# Altium PCB Copy of djb_v2_jig_a.PcbDoc
Units mm, origin at the board's own origin, x right, y up, seen from the top; angles counter-clockwise.
Board outline 59 x 33.99 mm, 2 copper layers (Top Layer, Bottom Layer), stack 1.569 mm thick; 19 components, 9 nets, 35 pads, 0 vias.
Unrouted connection lines stored in the file: 12.
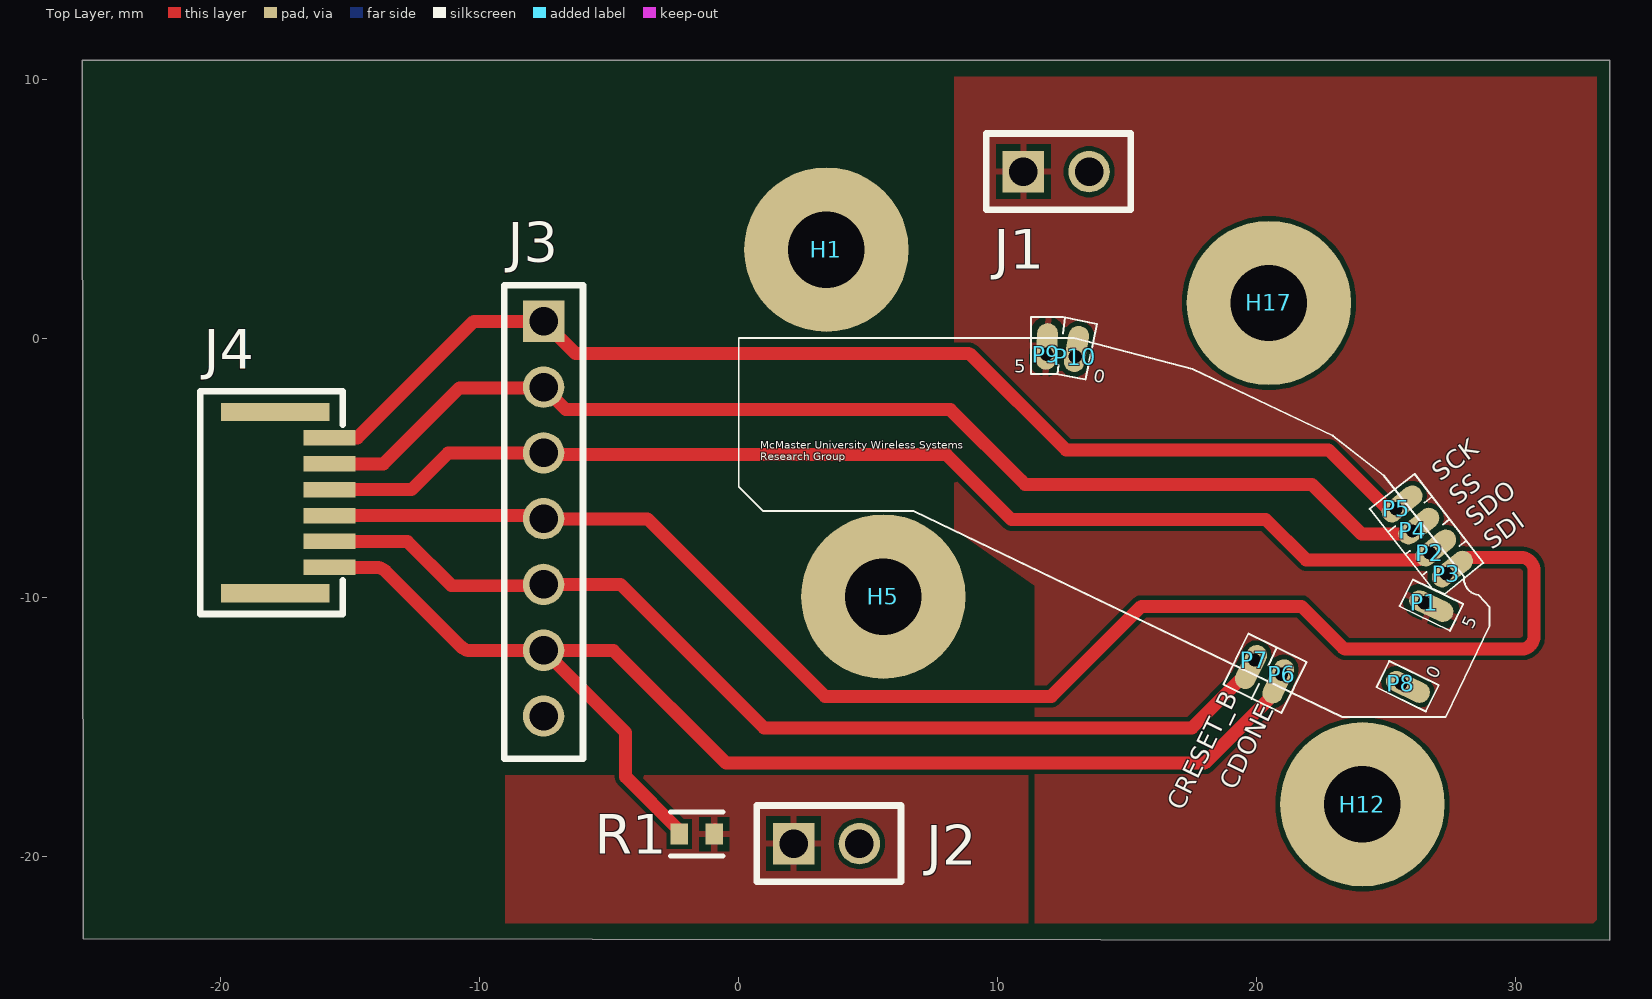
[diagram p0: Top Layer view]
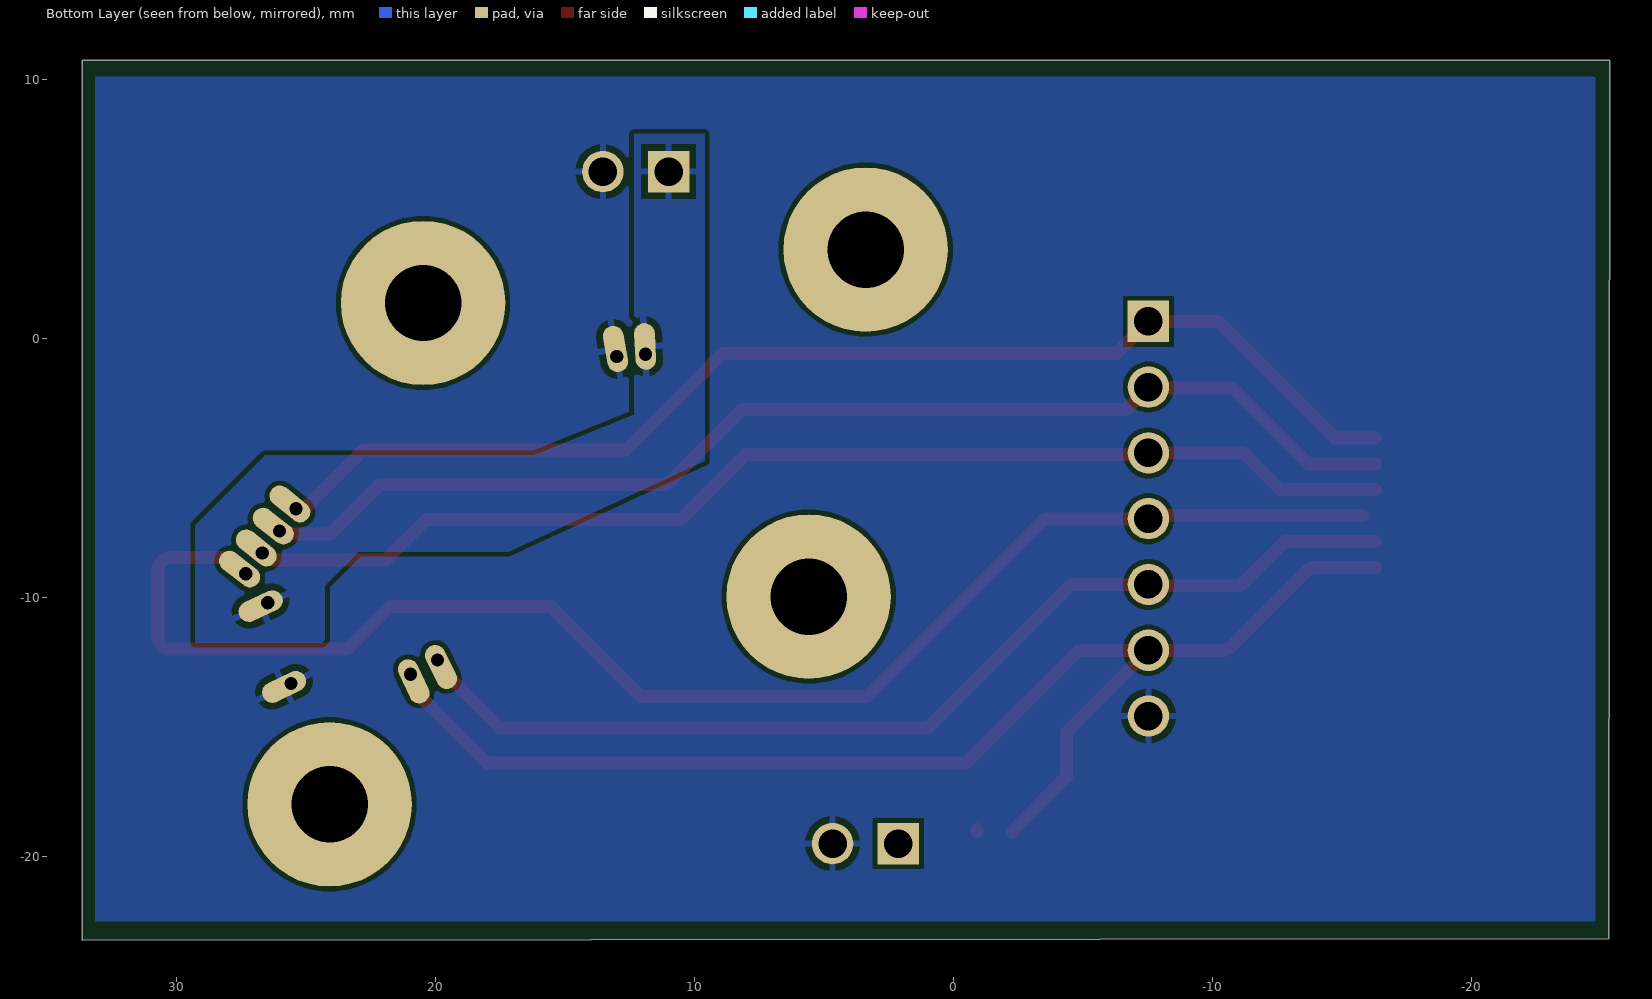
[diagram p1: Bottom Layer view, seen from below]

## Layer stack, top to bottom
Top Solder: solder mask 0.0254, SM-001, Dk 4
Top Layer: signal copper 0.035
Dielectric 1: core 1.4986, Core-043, Dk 4.3
Bottom Layer: signal copper 0.035
Bottom Solder: solder mask 0.0254, SM-001, Dk 4

## Board outline
-25.31,-23.19 -25.36,10.75 33.64,10.75 33.64,-23.24

## Design rules (kind name [scope] priority, off if disabled: settings)
Clearance [All] p1: gap=0.178 ignorepadtopadclearanceinfootprint=FALSE
ComponentClearance [All] p1: gap=0.025 collisioncheckmode=3 verticalgap=0.025 showdistances=TRUE
HoleSize [All] p1: absolutevalues=TRUE maxlimit=5.08 minlimit=0.254 maxpercent=80.000 minpercent=20.000
MinimumSolderMaskSliver [All] p1: minsoldermaskwidth=0.127
PolygonConnect [All] p1: connectstyle=Relief reliefconductorwidth=0.254 reliefentries=4 polygonreliefangle="90 Angle" airgapwidth=0.254
RoutingVias [All] p1: holewidth=0.51 width=0.8 viastyle="Through Hole" minholewidth=0.51 minwidth=0.8 maxholewidth=0.51 maxwidth=0.8
SilkToSilkClearance [All] p1: silktosilkclearance=0
SilkToSolderMaskClearance [IsPad] p1: minsilkscreentomaskgap=0 clearancetoexposedcopper=TRUE
SolderMaskExpansion [All] p1: expansion=0.102 istentingtop=FALSE
Width [All] p1: maxlimit=0.5 minlimit=0.127 preferedwidth=0.254
25 further rules are at their usual default settings.

## Components (designator, comment, footprint, x,y, rotation, side; value= is the part's Value field where it differs from the comment)
H1 "SCREW_4-40_1/4-SPACER" SCREW_4-40_1/4-SPACER 3.38,3.43 r0 top
H5 "SCREW_4-40_1/4-SPACER" SCREW_4-40_1/4-SPACER 5.58,-9.97 r0 top
H12 "SCREW_4-40_1/4-SPACER" SCREW_4-40_1/4-SPACER 24.08,-17.99 r0 top
H17 "SCREW_4-40_1/4-SPACER" SCREW_4-40_1/4-SPACER 20.47,1.37 r0 top
J1 "HDR_2" 2-POS_HEADER 12.26,6.44 r0 top
J2 "HDR_2" 2-POS_HEADER 3.39,-19.51 r0 top
J3 "prog_connect" 7-POS_HEADER -7.54,0.66 r270 top
J4 "FFC" AMPHENOL_HFW6R-1STE1LF -16.85,-6.34 r180 top
P1 "SMITHS_S-00-U-1.3-G_TH" SMITHS_S-00-U-1.3-G_TH 26.47,-10.21 r129 top
P2 "SMITHS_S-00-U-1.3-G_TH" SMITHS_S-00-U-1.3-G_TH 26.68,-8.28 r193 top
P3 "SMITHS_S-00-U-1.3-G_TH" SMITHS_S-00-U-1.3-G_TH 27.32,-9.09 r192 top
P4 "SMITHS_S-00-U-1.3-G_TH" SMITHS_S-00-U-1.3-G_TH 26.02,-7.43 r192 top
P5 "SMITHS_S-00-U-1.3-G_TH" SMITHS_S-00-U-1.3-G_TH 25.38,-6.58 r193 top
P6 "SMITHS_S-00-U-1.3-G_TH" SMITHS_S-00-U-1.3-G_TH 20.96,-12.97 r39 top
P7 "SMITHS_S-00-U-1.3-G_TH" SMITHS_S-00-U-1.3-G_TH 19.91,-12.42 r38 top
P8 "SMITHS_S-00-U-1.3-G_TH" SMITHS_S-00-U-1.3-G_TH 25.57,-13.32 r128 top
P9 "SMITHS_S-00-U-1.3-G_TH" SMITHS_S-00-U-1.3-G_TH 11.88,-0.61 r241 top
P10 "SMITHS_S-00-U-1.3-G_TH" SMITHS_S-00-U-1.3-G_TH 12.99,-0.7 r234 top
R1 "RC0603FR-0710KL" FP-RC0603-0_55-IPC_C -1.623,-19.14 r180 top

## Footprints (in the part's own frame and the unit in brackets; to place one, negate y for a bottom-side part, rotate by r counter-clockwise, add the part's x,y. Pads: shape width x height; smd on the part's side, far side on the other; paste and mask are expansions set on the pad)
2-POS_HEADER [mm] "2 pin header 2.54 mm pitch"
  rect 1.6x1.6 hole 1.1: 1(-1.27,0)
  round 1.6 hole 1.1: 2(1.27,0)
  silkscreen extent -2.7,-1.48 2.88,1.47, body extent -2.46,-1.25 2.61,1.25, height 8.21
7-POS_HEADER [mm] "7-pos male pin header, 2.54mm pitch"
  rect 1.6x1.6 hole 1.1: 1(0,0)
  round 1.6 hole 1.1: 2(2.54,0) 3(5.08,0) 4(7.62,0) 5(10.16,0) 6(12.7,0) 7(15.24,0)
  silkscreen extent -1.4,-1.52 16.89,1.52, body extent -1.17,-1.25 16.61,1.25, height 8.21
AMPHENOL_HFW6R-1STE1LF [mm] "Amphenol HFW6R-1STE1LF 6-pin flat flexible cable connector"
  rect 4.2x0.7 smd: 0(1.05,3.5) 0(1.05,-3.5)
  rect 2x0.6 smd: 1(-1.05,-2.5) 2(-1.05,-1.5) 3(-1.05,-0.5) 4(-1.05,0.5) 5(-1.05,1.5) 6(-1.05,2.5)
  silkscreen extent -1.55,-4.3 3.95,4.3, body extent -1.55,-4.3 3.95,4.3, height 1.9
FP-RC0603-0_55-IPC_C [mm]
  rect 0.659x0.812 smd paste+0 mask+0: 1(-0.677,0) 2(0.677,0)
  silkscreen extent -1.01,-0.85 1.01,0.85, body extent -1.11,-0.55 1.11,0.55, height 0.25
SCREW_4-40_1/4-SPACER [mil] "Hole for 4-40 screw with 1/4\" spacer"
  round 250 hole 116 paste-39370.1 mask-39370.1: 0(0,0)
  body extent -125,-125 125,125, height 600
SMITHS_S-00-U-1.3-G_TH [mm] "Smiths Interconnect / IDI S-00-U-1.3-G Pogo Pin, Through-Hole Mount"
  oval 0.8x1.8 hole 0.51 copper offset -0.27,-0.132 rot 116: 1(0,0)
  body extent -0.49,-0.47 0.43,0.45, height 13.33

## Part data
H1 H5 H12 H17: "Hole for 4-40 screw with 1/4\" spacer"
J1 J2: "2-pin 0.1\" header"
J3: "7-pos male pin header, 2.54mm pitch"
J4: library part AMPHENOL_HFW6R-1STE1LF, "Amphenol HFW6R-1STE1LF 6-pin flat flexible cable connector"
P1 P2 P3 P4 P5 P6 P7 P8 P9 P10: "Smiths Interconnect / IDI S-00-U-1.3-G Pogo Pin 0.99mm Centers 16.7mm Long 2.8mm Travel, Through Hole Mount"
R1: library part CMP-2100-03664-2, "RES 10K OHM 1% 1/10W 0603", Case Code (Imperial)=0603, Case Code (Metric)=1608, Max Operating Temperature=155°C, Max Power Dissipation=100mW, Min Operating Temperature=-55°C, Resistance=10kR, Resistance Tolerance=1%, Resistor Type="Thick Film", Temperature Coefficient=100ppm/°C, Voltage Rating=75V, Voltage Rating (DC)=50V, Case/Package=0603, Construction=Rectangular, Depth=0.8mm, Features="Moisture Resistant", Height=0.45mm, Lead Free="Lead Free", Lead Pitch=0.3mm, Length=1.6mm, Military Standard=Not, Number of Pins=2, Number of Terminations=2, Packaging="Tape and Reel", Power Rating=100mW, RoHS Compliant=Yes, Series=RC, Size Code=0603, Termination=SMD/SMT, Tolerance=1%, Weight=7.1E-05oz, Width=0.8mm

## Nets (pads, with @x,y where several pads share a name; then routed paths per layer and width w, separated by ;. In a path a pad name is that pad's centre, name@x,y a point inside that pad or via, vN(x,y) a via of type N, cw(c..) or ccw(c..) an arc to the next point about the centre after c; other vN are vias at no path point)
+3V3: J2.1 R1.1 | length 0.1
  Top Layer w0.5: R1.1@-0.913,-19.037 R1.1@-0.913,-18.96
+5V: J1.1 P1.1 P9.1
CDONE: J3.6 J4.6 P6.1 R1.2 | length 50.5
  Top Layer w0.5: J4.6@-16.3,-8.84 -13.997,-8.84 cw(c-13.997,-9.34) -13.642,-8.988 -10.725,-11.905 ccw(c-10.373,-11.55) -10.374,-12.05 J3.6@-7.55,-12.05 ; R1.2@-2.29,-19.08 -2.29,-19.01 -4.37,-16.93 -4.37,-15.215 -7.535,-12.05 -5.047,-12.05 -4.86,-12.05 ccw(c-4.756,-11.561) -4.835,-12.055 -0.49,-16.4 17.99,-16.4 P6.1@20.615,-13.775 ; P6.1@20.95,-12.95 21.03,-12.778 P6.1@20.987,-12.758
CRESET_B: J3.5 J4.5 P7.1 | length 40.4
  Top Layer w0.5: J4.5@-16.3,-7.84 -12.8,-7.84 -11.09,-9.55 J3.5@-7.55,-9.55 ; J3.5 -4.56,-9.5 0.976,-15.036 17.504,-15.036 19.91,-12.63 19.91,-12.423 P7.1
GND: J1.2 J2.2 J3.7 P8.1 P10.1
SCK: J3.1 J4.1 P5.1 | length 46.5
  Top Layer w0.5: J4.1@-16.3,-3.84 -14.73,-3.84 -10.23,0.66 J3.1 -6.31,-0.57 -6.29,-0.57 ; -6.3,-0.58 8.879,-0.58 ; 8.958,-0.628 12.64,-4.31 22.767,-4.31 22.777,-4.32 22.79,-4.32 P5.1@25.055,-6.585 ; P5.1@25.086,-6.648 25.327,-6.648 P5.1@25.39,-6.585
SDI: J3.4 J4.4 P3.1 | length 58.1
  Top Layer w0.5: J4.4 -7.66,-6.84 J3.4 ; J3.4@-7.535,-6.97 -3.52,-6.97 3.33,-13.82 12.07,-13.82 15.545,-10.345 21.73,-10.345 23.31,-11.925 ccw(c23.488,-11.751) 23.487,-12 30.212,-12 ccw(c30.21,-11.5) 30.71,-11.5 30.71,-8.96 ccw(c30.21,-8.96) 30.21,-8.46 29.33,-8.46 P3.1@28.173,-8.46 ; P3.1@27.3,-9.1 P3.1@28.08,-8.5
SDO: J3.3 J4.3 P2.1 | length 44.4
  Top Layer w0.5: J4.3@-16.3,-5.84 -12.64,-5.84 -11.23,-4.43 -7.84,-4.43 J3.3@-7.71,-4.56 ; J3.3@-6.811,-4.49 8.02,-4.49 10.53,-7 20.35,-7 ; 20.38,-7.02 21.91,-8.55 26.194,-8.55 ccw(c26.193,-8.05) 26.546,-8.404 P2.1@26.665,-8.285
SS: J3.2 J4.2 P4.1 | length 45.7
  Top Layer w0.5: J4.2@-16.3,-4.84 -13.72,-4.84 -10.79,-1.91 J3.2@-7.77,-1.91 ; J3.2@-7.535,-1.89 -6.681,-2.744 ; -6.66,-2.75 8.17,-2.75 10.914,-5.494 11.06,-5.64 21.93,-5.64 22.142,-5.645 24.055,-7.558 25.724,-7.558 25.847,-7.435 P4.1@26.015,-7.435
pads on no net: H1.0 H5.0 H12.0 H17.0 J4.0

## Polygon pours and split planes (outlines as drawn)
+5V on Top Layer "+5V_L01_P002" (solid, remove dead copper, pour order 2): 8.32,10.111 8.32,-7.363 11.42,-9.55 11.42,-22.579 33,-22.579 33.14,-22.439 33.14,10.111
+3V3 on Top Layer "+3V3_L01_P000" (solid, pour order 0): -9.01,-16.87 11.17,-16.87 11.17,-22.58 -9.01,-22.58 -9.01,-17.19
GND on Bottom Layer "GND_L02_P001" (solid, pour order 1): -24.73,10.11 -24.8,10.04 -24.8,-22.51 33.14,-22.51 33.14,10.11
+5V on Bottom Layer "+5V_L02_P003" (solid, remove dead copper, pour order 3): 9.6,7.9 12.32,7.9 12.32,-2.944 16.201,-4.51 26.58,-4.51 29.27,-7.2 29.27,-11.752 24.26,-11.752 24.26,-9.541 22.955,-8.236 17.172,-8.236 9.6,-4.729

## Silkscreen, mask and mechanical layers (free items; w line width, h text height)
Top Overlay:
  lines w0.076: 12.3,-1.37 12.35,-1.023 ; 12.52,0.19 12.59,0.8 ; 19.8,-13.92 20.09,-13.34 ; 20.45,-12.63 20.77,-11.95 ; 25.08,-7.46 25.35,-7.25 ; 25.747,-8.337 25.918,-8.2 ; 26.38,-9.16 26.564,-9.015 ; 26.48,-6.34 26.77,-6.11 ; 27.19,-7.19 27.44,-6.99 ; 27.83,-8.01 28.08,-7.82 ; -0.002,-5.726 -0.002,0.013 12.945,0.013 17.514,-1.179 22.942,-3.754 24.898,-5.287 28.001,-9.184 ccw(c28.651,-9.262) 28.573,-9.912 28.998,-10.387 28.998,-11.087 27.298,-14.612 23.306,-14.612 6.748,-6.662 0.934,-6.662 -0.002,-5.726 ; 11.28,-1.37 12.273,-1.37 13.384,-1.586 13.828,0.565 12.515,0.82 11.28,0.82 11.28,-1.37 ; 18.714,-13.364 19.675,-11.393 21.921,-12.489 20.96,-14.46 18.714,-13.364 ; 24.36,-6.583 26.094,-5.232 28.752,-8.666 27.251,-9.872 26.776,-9.657 24.36,-6.583 ; 24.621,-13.469 25.117,-12.451 27.027,-13.382 26.53,-14.4 24.621,-13.469 ; 25.521,-10.339 26.026,-9.303 27.975,-10.254 27.47,-11.29 25.521,-10.339
  text "5" at 10.63,-1.33 h0.51
  text "0" at 14.1,-1.75 h0.51 r348
  text "McMaster University Wireless Systems / Research Group" at 0.83,-4.71 h0.3
  text "SCK" at 27.08,-5.53 h0.7 r37
  text "SS" at 27.77,-6.47 h0.7 r38
  text "SDO" at 28.41,-7.3 h0.7 r38
  text "SDI" at 29.08,-8.17 h0.7 r36
  text "5" at 28.34,-11.27 h0.51 r64
  text "0" at 27.14,-12.8 h0.51 r64
  text "CDONE" at 19.16,-17.48 h0.7 r64
  text "CRESET_B" at 17.13,-18.27 h0.7 r64
Board:
  the board outline again, w0.254